# EAGLE board WifiTracker (EAGLE 9.1.3)
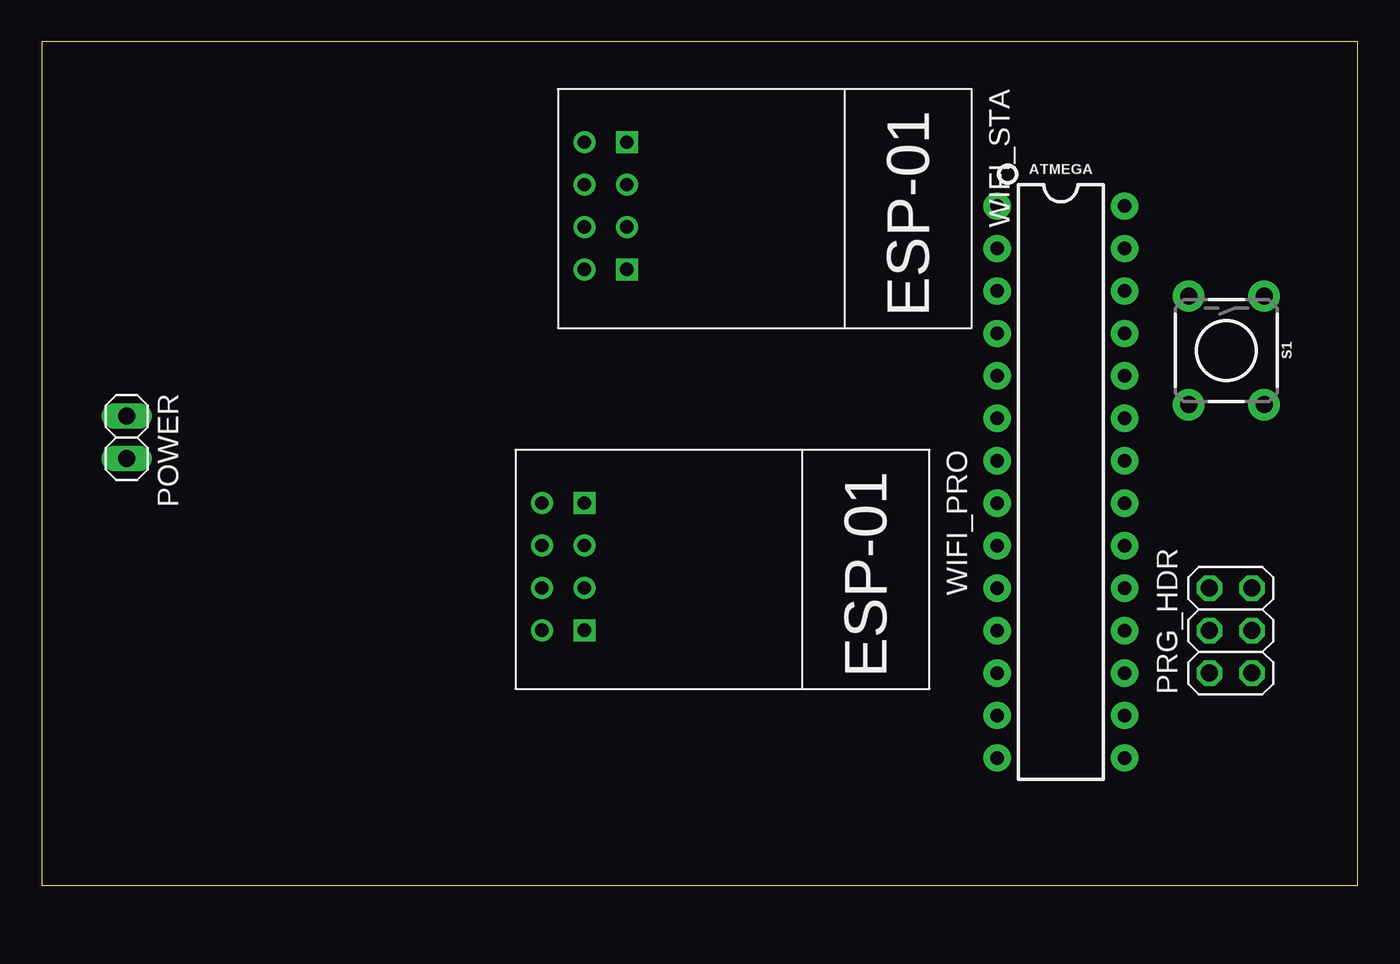
[diagram p0: board, top side]
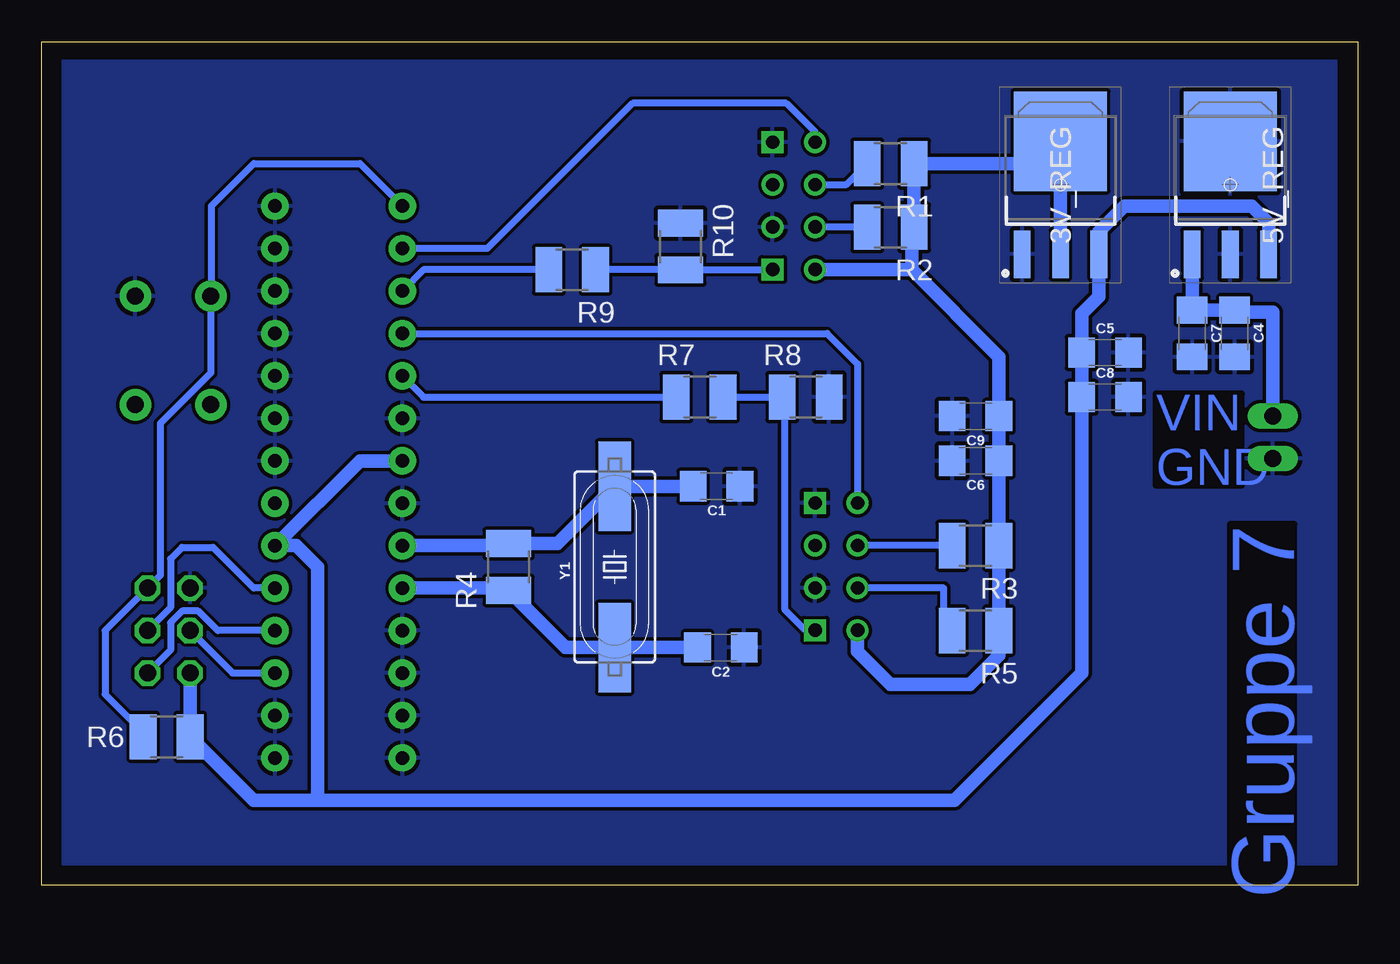
[diagram p1: board, bottom side, seen from below]

Size 78.72 x 50.47 mm. Coordinates in mm from the lower left corner, seen from the top.
Outline: 0,0 78.72,0 78.72,50.47 0,50.47 0,0
Copper layers (1*16): Top 0.035mm / dielectric 1.5mm / Bottom 0.035mm
Design rules "default *": minimum track width 6mil, minimum drill 0.35mm, track to track 6mil, track to pad 6mil, pad to pad 6mil, via to via 6mil, smd to smd 6mil, copper to edge 40mil, drill to drill 6mil, minimum pad ring 10mil, minimum via ring 8mil, stop-mask expansion 4mil, vias tented up to drill 0mil, thermal gap 10mil
Net classes: 0 default: width 0.406 mm, drill 0.203 mm, clearance 0.203 mm; 1 power: width 0.813 mm, drill 0.203 mm, clearance 0.203 mm; 2 text: width 0.203 mm, drill 0.203 mm, clearance 0.203 mm

## Footprints (pad centres in the part's own frame; a part is rotated, then mirrored left to right if it is on the bottom)
TO229P990X238-4N = smd 2.85 x 1: 1 -4.15,2.29; 2 -4.15,0; 3 -4.15,-2.29 | smd 5.95 x 5.55: 4 2.6,0
DIP28 = drill 0.813 pad 1.626: 1 -16.51,-3.81; 2 -13.97,-3.81; 3 -11.43,-3.81; 4 -8.89,-3.81; 5 -6.35,-3.81; 6 -3.81,-3.81; 7 -1.27,-3.81; 8 1.27,-3.81; 9 3.81,-3.81; 10 6.35,-3.81; 11 8.89,-3.81; 12 11.43,-3.81; 13 13.97,-3.81; 14 16.51,-3.81; 15 16.51,3.81; 16 13.97,3.81; 17 11.43,3.81; 18 8.89,3.81; 19 6.35,3.81; 20 3.81,3.81; 21 1.27,3.81; 22 -1.27,3.81; 23 -3.81,3.81; 24 -6.35,3.81; 25 -8.89,3.81; 26 -11.43,3.81; 27 -13.97,3.81; 28 -16.51,3.81
1206 = smd 1.6 x 1.8: 1 -1.4,0; 2 1.4,0
1X02 = drill 1.016 long: 1 -1.27,0; 2 1.27,0
2X03 = drill 1.016 octagon: 1 -2.54,-1.27; 2 -2.54,1.27; 3 0,-1.27; 4 0,1.27; 5 2.54,-1.27; 6 2.54,1.27
R1210 = smd 1.6 x 2.7: 1 -1.4,0; 2 1.4,0
TACTILE_SWITCH_PTH_6.0MM = drill 1.016 pad 1.88: 1 -3.251,2.261; 2 3.251,2.261; 3 -3.251,-2.261; 4 3.251,-2.261
ESP01 = drill 0.8: CH_PD -1.285,-8.178; GPIO0 1.255,-5.638; GPIO2 -1.285,-5.638; RST 1.255,-8.178; TX -3.825,-8.178; VCC 3.795,-8.178 | drill 0.8 square: GND -3.825,-5.638; RX 3.795,-5.638
HC49UP = smd 5.334 x 1.93: 1 -4.826,0; 2 4.826,0

## Placement (x,y rotation side)
3V_REG  TS1117CP33-R0  [TO229P990X238-4N]  17.78,41.91 90 bottom
5V_REG  LP2950CDT-5.0G  [TO229P990X238-4N]  7.62,41.91 90 bottom
ATMEGA  328P  [DIP28]  60.96,24.13 270 top
C1  22pF  [1206]  38.35,23.88 180 bottom
C2  22pF  [1206]  38.1,14.22 180 bottom
C4  10uF  [1206]  7.37,33.02 270 bottom
C5  10uF  [1206]  15.11,31.88 0 bottom
C6  10uF  [1206]  22.86,25.4 180 bottom
C7  0.1uF  [1206]  9.91,33.02 270 bottom
C8  0.1uF  [1206]  15.11,29.21 0 bottom
C9  0.1uF  [1206]  22.86,28.07 180 bottom
POWER  [1X02]  5.08,26.8 270 top
PRG_HDR  [2X03]  71.12,15.24 90 top
R1  10KΩ  [R1210]  27.94,43.18 180 bottom
R2  10KΩ  [R1210]  27.94,39.37 180 bottom
R3  10kΩ  [R1210]  22.86,20.32 180 bottom
R4  1MΩ  [R1210]  50.8,19.05 90 bottom
R5  10kΩ  [R1210]  22.86,15.24 180 bottom
R6  10kΩ  [R1210]  71.25,8.89 180 bottom
R7  1kΩ  [R1210]  39.37,29.21 0 bottom
R8  2.2kΩ  [R1210]  33.02,29.21 0 bottom
R9  1kΩ  [R1210]  46.99,36.83 180 bottom
R10  2.2kΩ  [R1210]  40.51,38.23 270 bottom
S1  MOMENTARY-SWITCH-SPST-PTH-6.0MM  [TACTILE_SWITCH_PTH_6.0MM]  70.87,32 270 top
WIFI_PRO  ESP01  [ESP01]  38.1,19.05 270 top
WIFI_STA  ESP01  [ESP01]  40.64,40.64 270 top
Y1  16MHz  [HC49UP]  44.45,19.05 90 bottom

## Library data of the parts
3V_REG = TS1117CP33-R0; ALLIED_NUMBER: 70100442; ALLIED_PRICE-STOCK: http://www.alliedelec.com/on-semiconductor-lp2950cdt-5-0g/70100442/; HEIGHT: 2.38mm; MANUFACTURER_NAME: ON Semiconductor; MANUFACTURER_PART_NUMBER: LP2950CDT-5.0G; MOUSER_PART_NUMBER: 863-LP2950CDT-5.0G; MOUSER_PRICE-STOCK: https://www.mouser.com/Search/Refine.aspx?Keyword=863-LP2950CDT-5.0G; RS_PART_NUMBER: 0463593P; RS_PRICE-STOCK: http://uk.rs-online.com/web/p/products/0463593P
5V_REG = LP2950CDT-5.0G; ALLIED_NUMBER: 70100442; ALLIED_PRICE-STOCK: http://www.alliedelec.com/on-semiconductor-lp2950cdt-5-0g/70100442/; HEIGHT: 2.38mm; MANUFACTURER_NAME: ON Semiconductor; MANUFACTURER_PART_NUMBER: LP2950CDT-5.0G; MOUSER_PART_NUMBER: 863-LP2950CDT-5.0G; MOUSER_PRICE-STOCK: https://www.mouser.com/Search/Refine.aspx?Keyword=863-LP2950CDT-5.0G; RS_PART_NUMBER: 0463593P; RS_PRICE-STOCK: http://uk.rs-online.com/web/p/products/0463593P
ATMEGA = SparkFun-IC-Microcontroller; PROD_ID: IC-09136
C1 C2 C4-C9 = SparkFun-Capacitors; PROD_ID: CAP-09822
POWER PRG_HDR = pinhead
R1-R10 = eagle-ltspice; SPICEMODEL: NONE; SPICEPREFIX: R
S1 = SparkFun-Switches; PROD_ID: SWCH-08441; SF_SKU: COM-00097
WIFI_PRO WIFI_STA = esp8266modules
Y1 = SparkFun-Clocks; PROD_ID: XTAL-11706

## Nets
3VCC [power]: 3V_REG.2 3V_REG.4 C6.1 C9.1 R1.1 R2.1 R3.1 R5.1 WIFI_PRO.VCC WIFI_STA.VCC
5VCC [power]: 3V_REG.3 5V_REG.3 ATMEGA.7 ATMEGA.20 C5.1 C8.1 PRG_HDR.2 R6.1
AT_STXD: ATMEGA.5 R7.1
AT_TXD: ATMEGA.3 R9.2
ATMEGA_RESET: ATMEGA.1 PRG_HDR.5 R6.2 S1.3
GND [power]: 3V_REG.1 5V_REG.2 5V_REG.4 ATMEGA.6 ATMEGA.8 ATMEGA.11 ATMEGA.12 ATMEGA.13 ATMEGA.14 ATMEGA.15 ATMEGA.16 ATMEGA.22 ATMEGA.23 ATMEGA.24 ATMEGA.25 ATMEGA.26 ATMEGA.27 ATMEGA.28 C1.1 C2.1 C4.2 C5.2 C6.2 C7.2 C8.2 C9.2 POWER.2 PRG_HDR.6 R8.2 R10.1 S1.1 WIFI_PRO.GND WIFI_PRO.GPIO0 WIFI_STA.GND WIFI_STA.GPIO0
MISO: ATMEGA.18 PRG_HDR.1
MOSI: ATMEGA.17 PRG_HDR.4
PRO_CH_PD: R3.2 WIFI_PRO.CH_PD
PRO_RST: R5.2 WIFI_PRO.RST
PRO_RXD: R7.2 R8.1 WIFI_PRO.RX
PRO_TXD: ATMEGA.4 WIFI_PRO.TX
SCK: ATMEGA.19 PRG_HDR.3
STA_CH_PD: R1.2 WIFI_STA.CH_PD
STA_RST: R2.2 WIFI_STA.RST
STA_RXD: R9.1 R10.2 WIFI_STA.RX
STA_TXD: ATMEGA.2 WIFI_STA.TX
VIN [power]: 5V_REG.1 C4.1 C7.1 POWER.1
XTAL1: ATMEGA.9 C1.2 R4.2 Y1.2
XTAL2: ATMEGA.10 C2.2 R4.1 Y1.1

## Tracks (layer width: path | path; a pad name or v marks a point on that pad's centre or on a via)
3VCC
  Bottom 0.813: 3V_REG.2 3V_REG.4 19.11,43.18 R1.1 R2.1 26.67,39.24 26.67,36.83 | 26.67,36.83 21.46,31.62 C9.1 C6.1 R3.1 R5.1 21.46,13.76 23.21,12.01 27.95,12.01 29.92,13.99 WIFI_PRO.VCC | 26.67,36.83 32.45,36.83 WIFI_STA.VCC
5VCC
  Bottom 0.813: 16.51,31.75 C8.1 16.51,12.7 24.13,5.08 62.23,5.08 | 16.51,31.75 C5.1 | ATMEGA.7 59.69,25.4 ATMEGA.20 63.5,20.32 62.23,19.05 62.23,5.08 | 62.23,5.08 66.04,5.08 R6.1 PRG_HDR.2 | 16.51,31.75 16.51,34.2 15.49,35.22 3V_REG.3 15.49,39.12 13.97,40.64 6.35,40.64 5.33,39.62 5V_REG.3
AT_STXD
  Bottom 0.406: ATMEGA.5 55.88,29.21 R7.1
AT_TXD
  Bottom 0.406: R9.2 55.88,36.83 ATMEGA.3
ATMEGA_RESET
  Bottom 0.406: ATMEGA.1 59.69,43.18 66.04,43.18 68.58,40.64 68.58,35.28 S1.3 68.61,30.66 71.63,27.63 71.63,18.54 PRG_HDR.5 74.93,15.24 74.93,11.43 72.65,9.15 R6.2
GND
  pour Bottom: 1.27,49.53 77.47,49.53 77.47,1.27 1.27,1.27
MISO
  Bottom 0.406: ATMEGA.18 68.2,15.24 69.37,16.41 70.33,16.41 71.02,15.72 71.02,14.07 PRG_HDR.1
MOSI
  Bottom 0.406: PRG_HDR.4 67.31,12.7 ATMEGA.17
PRO_CH_PD
  Bottom 0.406: WIFI_PRO.CH_PD 29.85,20.32 24.77,20.32 R3.2
PRO_RST
  Bottom 0.406: WIFI_PRO.RST 29.85,17.78 24.77,17.78 24.77,15.24 R5.2
PRO_RXD
  Bottom 0.406: R7.2 R8.1 34.29,29.08 34.29,16.51 33.03,15.26 WIFI_PRO.RX
PRO_TXD
  Bottom 0.406: ATMEGA.4 31.75,33.02 29.92,31.19 WIFI_PRO.TX
SCK
  Bottom 0.406: ATMEGA.19 66.04,17.78 68.48,20.22 70.33,20.22 71.02,19.53 71.02,16.61 PRG_HDR.3
STA_CH_PD
  Bottom 0.406: WIFI_STA.CH_PD 30.6,41.92 R1.2
STA_RST
  Bottom 0.406: WIFI_STA.RST 32.39,39.37 29.85,39.37 R2.2
STA_RXD
  Bottom 0.406: WIFI_STA.RX 35.02,36.83 R10.2 R9.1
STA_TXD
  Bottom 0.406: WIFI_STA.TX 32.46,45.08 34.18,46.79 43.38,46.79 52.07,38.1 ATMEGA.2
VIN
  Bottom 0.813: POWER.1 5.08,34.29 7.24,34.29 C4.1 C7.1 5V_REG.1
XTAL1
  Bottom 0.813: C1.2 Y1.2 47.88,20.45 R4.2 50.93,20.32 ATMEGA.9
XTAL2
  Bottom 0.813: ATMEGA.10 50.93,17.78 R4.1 47.37,14.22 Y1.1 C2.2

## Text on the board
Bottom: VIN / GND | Gruppe 7